# EAGLE board 15.DLD Lab Assignment (EAGLE 9.7.0)

Size 305.8 x 164.33 mm. Coordinates in mm from the lower left corner, seen from the top.
Outline: 0,0 305.8,0 305.8,164.33 0,164.33 0,0
Copper layers (1*16): Top 0.035mm / dielectric 1.5mm / Bottom 0.035mm
Design rules "default": minimum track width 6mil, minimum drill 0.35mm, track to track 6mil, track to pad 6mil, pad to pad 6mil, via to via 6mil, smd to smd 6mil, copper to edge 40mil, drill to drill 6mil, minimum pad ring 10mil, minimum via ring 8mil, stop-mask expansion 4mil, vias tented up to drill 0mil, thermal gap 10mil

## Footprints (pad centres in the part's own frame; a part is rotated, then mirrored left to right if it is on the bottom)
LEDRD254W60D565H860B = drill 0.981 pad 1.581: 1 -1.27,0; 2 1.27,0
1X02 = drill 1.016 long: 1 -1.27,0; 2 1.27,0
BATTERY-GENERIC = drill 1.118 pad 3.15 octagon: + 2.54,0; - -2.54,0
78B04ST = drill 0.8: 1 -3.81,-3.81; 2 -1.27,-3.81; 3 1.27,-3.81; 4 3.81,-3.81; 5 3.81,3.81; 6 1.27,3.81; 7 -1.27,3.81; 8 -3.81,3.81
DIP762W53P254L1969H508Q14B = drill 0.743 pad 1.343: 1 -3.81,7.62; 2 -3.81,5.08; 3 -3.81,2.54; 4 -3.81,0; 5 -3.81,-2.54; 6 -3.81,-5.08; 7 -3.81,-7.62; 8 3.81,-7.62; 9 3.81,-5.08; 10 3.81,-2.54; 11 3.81,0; 12 3.81,2.54; 13 3.81,5.08; 14 3.81,7.62

## Placement (x,y rotation side)
D1  RED  [LEDRD254W60D565H860B]  156.08,135.89 180 top
D2  RED  [LEDRD254W60D565H860B]  161.16,135.89 180 top
D3  RED  [LEDRD254W60D565H860B]  166.24,135.89 180 top
D4  RED  [LEDRD254W60D565H860B]  171.32,135.89 180 top
D6  RED  [LEDRD254W60D565H860B]  140.84,135.89 180 top
D7  RED  [LEDRD254W60D565H860B]  145.92,135.89 180 top
D8  RED  [LEDRD254W60D565H860B]  151,135.89 180 top
D9  RED  [LEDRD254W60D565H860B]  176.4,135.89 180 top
L1  LIGHTBULB  [1X02]  283.97,135.86 0 top
L2  LIGHTBULB  [1X02]  185.78,6.35 0 top
L3  LIGHTBULB  [1X02]  241.66,6.35 0 top
L4  LIGHTBULB  [1X02]  300.08,6.35 0 top
P1  BATTERYGENERIC  [BATTERY-GENERIC]  18.41,156.08 180 top
SW1  SPST-478B04ST  [78B04ST]  9.27,94.07 0 top
U1  74HC11_PDIP  [DIP762W53P254L1969H508Q14B]  126.87,121.92 90 top
U2  74HC04_PDIP  [DIP762W53P254L1969H508Q14B]  48.13,121.92 90 top
U3  74HC11_PDIP  [DIP762W53P254L1969H508Q14B]  104.01,121.92 90 top
U4  74HC11_PDIP  [DIP762W53P254L1969H508Q14B]  73.53,121.92 90 top
U5  74HC32_PDIP  [DIP762W53P254L1969H508Q14B]  229.36,121.89 90 top
U7  74HC32_PDIP  [DIP762W53P254L1969H508Q14B]  252.22,121.89 90 top
U8  74HC32_PDIP  [DIP762W53P254L1969H508Q14B]  161.65,15.24 90 top
U9  74HC32_PDIP  [DIP762W53P254L1969H508Q14B]  217.53,15.24 90 top
U10  74HC32_PDIP  [DIP762W53P254L1969H508Q14B]  275.95,15.24 90 top

## Library data of the parts
D1-D4 D6-D9 = Tinkercad; CATEGORY: Opto-Electronic; SUB-CATEGORY: LED; VALUE: LED_RED
L1-L4 P1 SW1 U1-U5 U7-U10 = Tinkercad

## Nets
P1+: P1.+ SW1.6 SW1.7 SW1.8 U1.14 U2.14 U3.14 U4.14 U5.14 U7.14 U8.14 U9.14 U10.14
P1-: D1.2 D2.2 D3.2 D4.2 D6.2 D7.2 D8.2 D9.2 L1.1 L2.1 L3.1 L4.1 P1.- U1.7 U2.7 U3.7 U4.7 U5.7 U7.7 U8.7 U9.7 U10.7
U1_1Y: D9.1 U1.12 U7.2 U8.5 U10.5
U1_2Y: D4.1 U1.6 U7.1 U8.4
U1_3Y: D3.1 U1.8 U5.9 U8.2 U10.4
U2_1A: SW1.1 U1.1 U1.3 U1.11 U2.1 U3.1
U2_1Y: U2.2 U3.3 U3.11 U4.1 U4.3
U2_2A: SW1.2 U1.2 U1.4 U2.3 U3.4 U3.10
U2_2Y: U1.10 U2.4 U3.2 U4.2 U4.4
U2_3A: SW1.3 U1.9 U1.13 U2.5 U3.5 U4.13
U2_3Y: U1.5 U2.6 U3.9 U3.13 U4.5
U3_1Y: D2.1 U3.12 U5.5 U8.1
U3_2Y: D1.1 U3.6 U5.4 U9.2 U10.2
U3_3Y: D8.1 U3.8 U5.2 U9.1
U4_1Y: D7.1 U4.12 U5.1 U10.1
U4_2Y: D6.1 U4.6
U5_1Y: U5.3 U5.13
U5_3Y: U5.8 U7.12
U5_4A: U5.6 U5.12
U5_4Y: U5.10 U5.11
U7_1Y: U7.3 U7.13
U7_4Y: L1.2 U7.11
U8_1Y: U8.3 U8.13
U8_2Y: U8.6 U8.12 U9.5
U8_4Y: L2.2 U8.11
U9_1Y: U9.3 U9.4
U9_2Y: L3.2 U9.6
U10_1Y: U10.3 U10.13
U10_2Y: U10.6 U10.12
U10_4Y: L4.2 U10.11

## Tracks (layer width: path | path; a pad name or v marks a point on that pad's centre or on a via)
P1+  (12 unrouted)
P1-  (21 unrouted)
U1_1Y  (4 unrouted)
U1_2Y  (3 unrouted)
U1_3Y  (4 unrouted)
U2_1A  (5 unrouted)
U2_1Y  (4 unrouted)
U2_2A  (5 unrouted)
U2_2Y  (4 unrouted)
U2_3A  (5 unrouted)
U2_3Y  (4 unrouted)
U3_1Y  (3 unrouted)
U3_2Y  (4 unrouted)
U3_3Y  (3 unrouted)
U4_1Y  (3 unrouted)
U4_2Y  (1 unrouted)
U5_1Y  (1 unrouted)
U5_3Y  (1 unrouted)
U5_4A  (1 unrouted)
U5_4Y  (1 unrouted)
U7_1Y  (1 unrouted)
U7_4Y  (1 unrouted)
U8_1Y  (1 unrouted)
U8_2Y  (2 unrouted)
U8_4Y  (1 unrouted)
U9_1Y  (1 unrouted)
U9_2Y  (1 unrouted)
U10_1Y  (1 unrouted)
U10_2Y  (1 unrouted)
U10_4Y  (1 unrouted)